# EAGLE board source_eagle (EAGLE 9.6.2)
REV: A
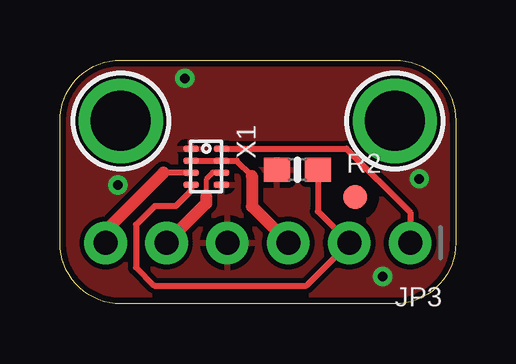
[diagram p0: board, top side]
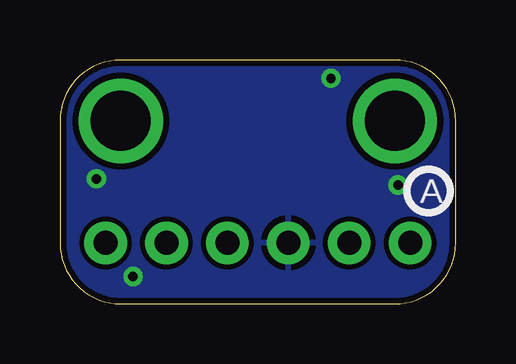
[diagram p1: board, bottom side, seen from below]

Size 16.51 x 10.16 mm. Coordinates in mm from the lower left corner, seen from the top.
Outline: 13.97,0 2.54,0 arc-90 0,2.54 0,7.62 arc-90 2.54,10.16 13.97,10.16 arc-90 16.51,7.62 16.51,2.54 arc-90 13.97,0
Copper layers (1*16): Top 0.035mm / dielectric 1.5mm / Bottom 0.035mm
Design rules "adafruit *": minimum track width 8mil, minimum drill 15.5mil, track to track 8mil, track to pad 8mil, pad to pad 8mil, via to via 8mil, smd to smd 8mil, copper to edge 10mil, drill to drill 8mil, minimum pad ring 10mil, minimum via ring 8mil, stop-mask expansion 2mil, vias tented up to drill 20mil, thermal gap 10mil

## Footprints (pad centres in the part's own frame; a part is rotated, then mirrored left to right if it is on the bottom)
FIDUCIAL_1MM = smd 1 x 1: 1 0,0
1X06_ROUND_70 = drill 1 pad 1.778: 1 -6.35,0; 2 -3.81,0; 3 -1.27,0; 4 1.27,0; 5 3.81,0; 6 6.35,0
0603-NO = smd 1.075 x 1: 1 -0.85,0; 2 0.85,0
MOUNTINGHOLE_2.5_PLATED = drill 2.5 pad 3.2: P$1 0,0
SOT583 = smd 0.275 x 0.65: 1 -0.75,-0.635; 2 -0.25,-0.635; 3 0.25,-0.635; 4 0.75,-0.635; 5 0.75,0.635; 6 0.25,0.635; 7 -0.25,0.635; 8 -0.75,0.635

## Placement (x,y rotation side)
FID2  FIDUCIAL_1MM  [FIDUCIAL_1MM]  12.32,4.45 0 top
JP3  [1X06_ROUND_70]  8.26,2.54 180 top
PLABEL0  [PLABEL0]  8.26,9.27 0 top
PLABEL1  [PLABEL1]  1.91,4.19 0 top
PLABEL2  [PLABEL2]  7.11,0.89 0 top
PLABEL3  [PLABEL3]  9.65,4.19 0 top
PLABEL4  [PLABEL4]  11.81,0.89 0 top
PLABEL5  [PLABEL5]  4.57,4.19 0 top
PLABEL6  [PLABEL6]  14.61,4.19 0 top
PLABEL7  [PLABEL7]  3.3,0.89 0 top
PLABEL8  [PLABEL8]  4.83,7.11 0 top
PLABEL9  [PLABEL9]  8.13,4.83 0 bottom
PLABEL10  [PLABEL10]  8.13,9.02 0 bottom
R2  1Meg  [0603-NO]  9.91,5.59 0 top
U$1  MOUNTINGHOLE2.5  [MOUNTINGHOLE_2.5_PLATED]  13.97,7.62 0 top
U$9  MOUNTINGHOLE2.5  [MOUNTINGHOLE_2.5_PLATED]  2.54,7.62 0 top
U$10  [PCBFEAT-REV-040]  1.14,4.7 0 bottom
X1  LM66200  [SOT583]  6.1,5.71 270 top

## Library data of the parts
FID2 = microbuilder; BOM: EXCLUDE
JP3 R2 = microbuilder
PLABEL0 PLABEL1-PLABEL10 = pinguin
U$1 U$9 = adafruit_electromech; BOM: EXCLUDE
U$10 = microbuilder; REV: A
X1 = adafruit_power

## Nets
!ON: JP3.2 R2.2 X1.4
GND: JP3.4 R2.1 X1.1 X1.5
STATUS: JP3.1 X1.8
VIN1: JP3.6 X1.3
VIN2: JP3.5 X1.6
VOUT: JP3.3 X1.2 X1.7

## Tracks (layer width: path | path; a pad name or v marks a point on that pad's centre or on a via)
!ON
  Top 0.254: R2.2 10.76,3.85 JP3.2 10.29,0.76 3.94,0.76 3.17,1.52 3.17,3.3 3.95,4.08 4.83,4.08 5.46,4.71 X1.4
GND  (via drill 0.39)
  other vias: 5.21,9.4 14.99,5.21 13.46,1.14 2.41,4.95
  pour Bottom: 0,10.16 0,0 16.51,0 16.51,10.16
  pour Top: 0,10.16 0,0 16.51,0 16.51,10.16
STATUS
  Top 0.254: X1.8 11.95,6.46 14.61,3.81 JP3.1
VIN1
  Top 0.254: X1.3 4.32,5.46
  Top 0.508: 4.32,5.46 1.91,3.05 JP3.6
VIN2
  Top 0.203: 6.37,5.46 6.1,5.19 6.1,4.45
  Top 0.254: X1.6 6.37,5.46
  Top 0.508: 6.1,4.45 6.1,4.19 JP3.5
VOUT
  Top 0.254: X1.2 X1.7 7.37,5.96 8,5.33
  Top 0.508: 8,5.33 8,4.06 JP3.3

## Text on the board
Pinguin_tBackup: LM66200 | Ideal Diodes | 1 | 2 | Vout | Sta | VIN | GND | !On
Pinguin_bBackup: LM66200 | 2.5A Out / VINs: 1.6-5.5V